# Altium PCB PCB_Indicator.PcbDoc
Units mm, origin at the board's own origin, x right, y up, seen from the top; angles counter-clockwise.
Board outline 30 x 30 mm, 2 copper layers (Top Layer, Bottom Layer); 17 components, 16 nets, 46 pads, 10 vias.
Unrouted connection lines stored in the file: 1.
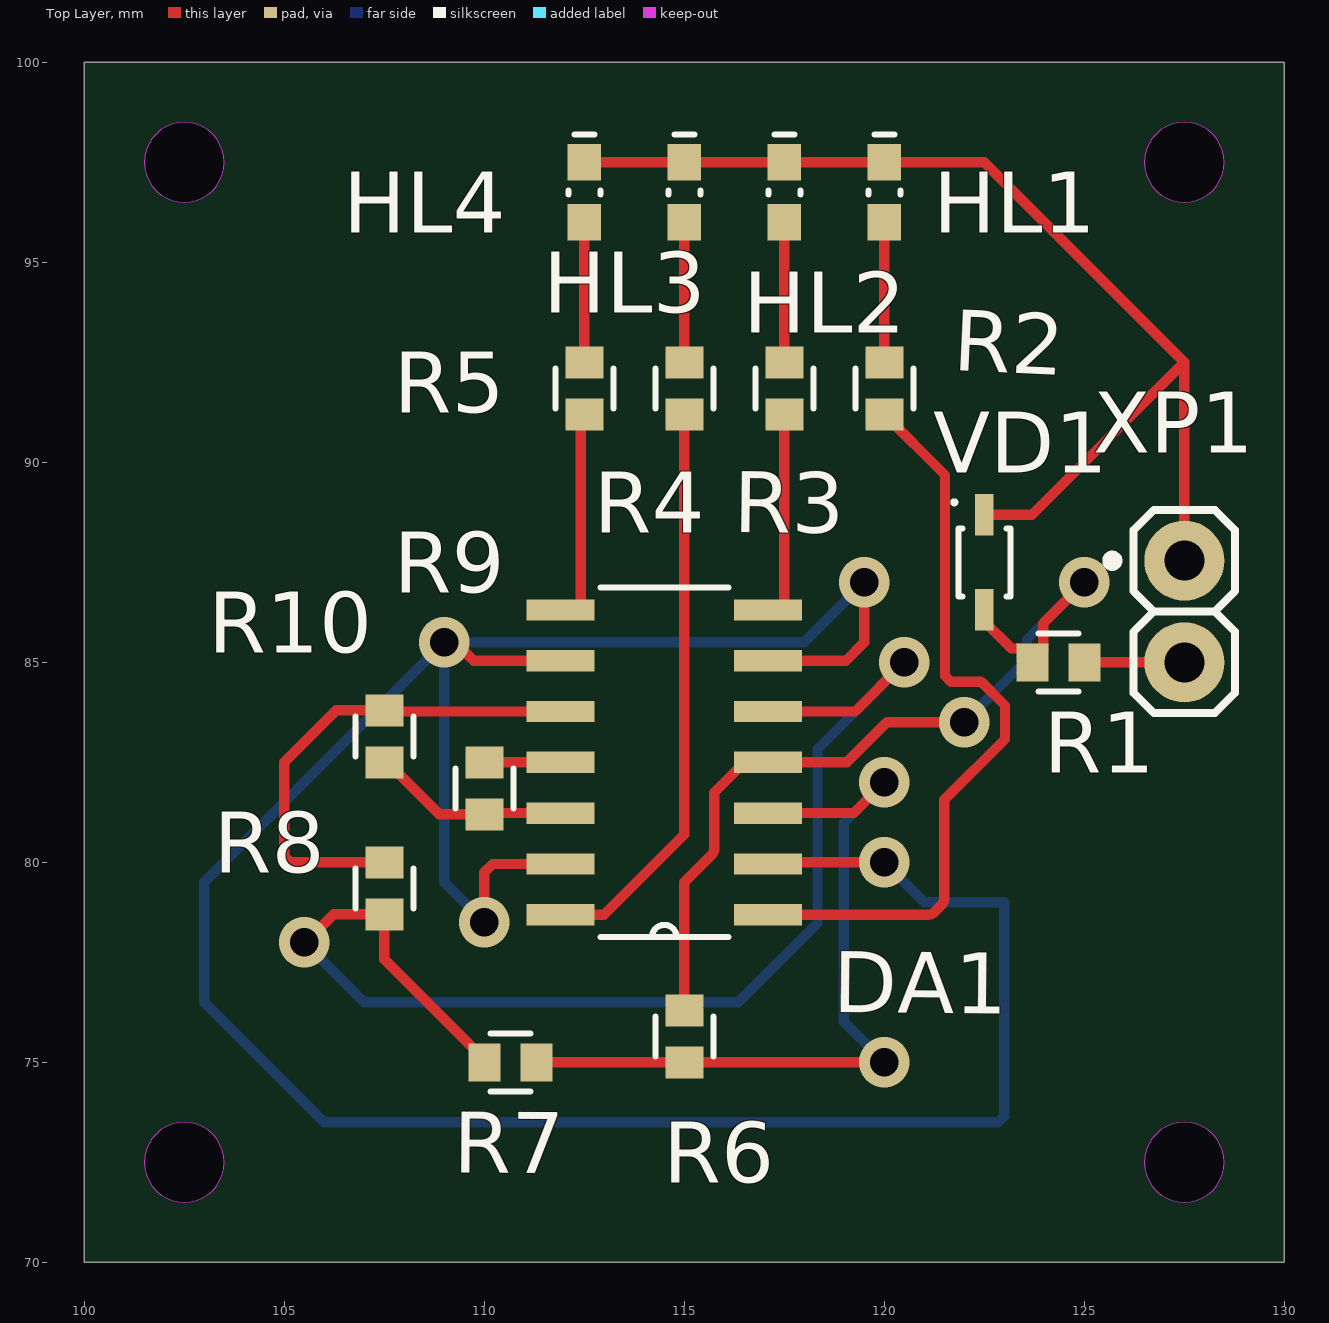
[diagram p0: Top Layer view]
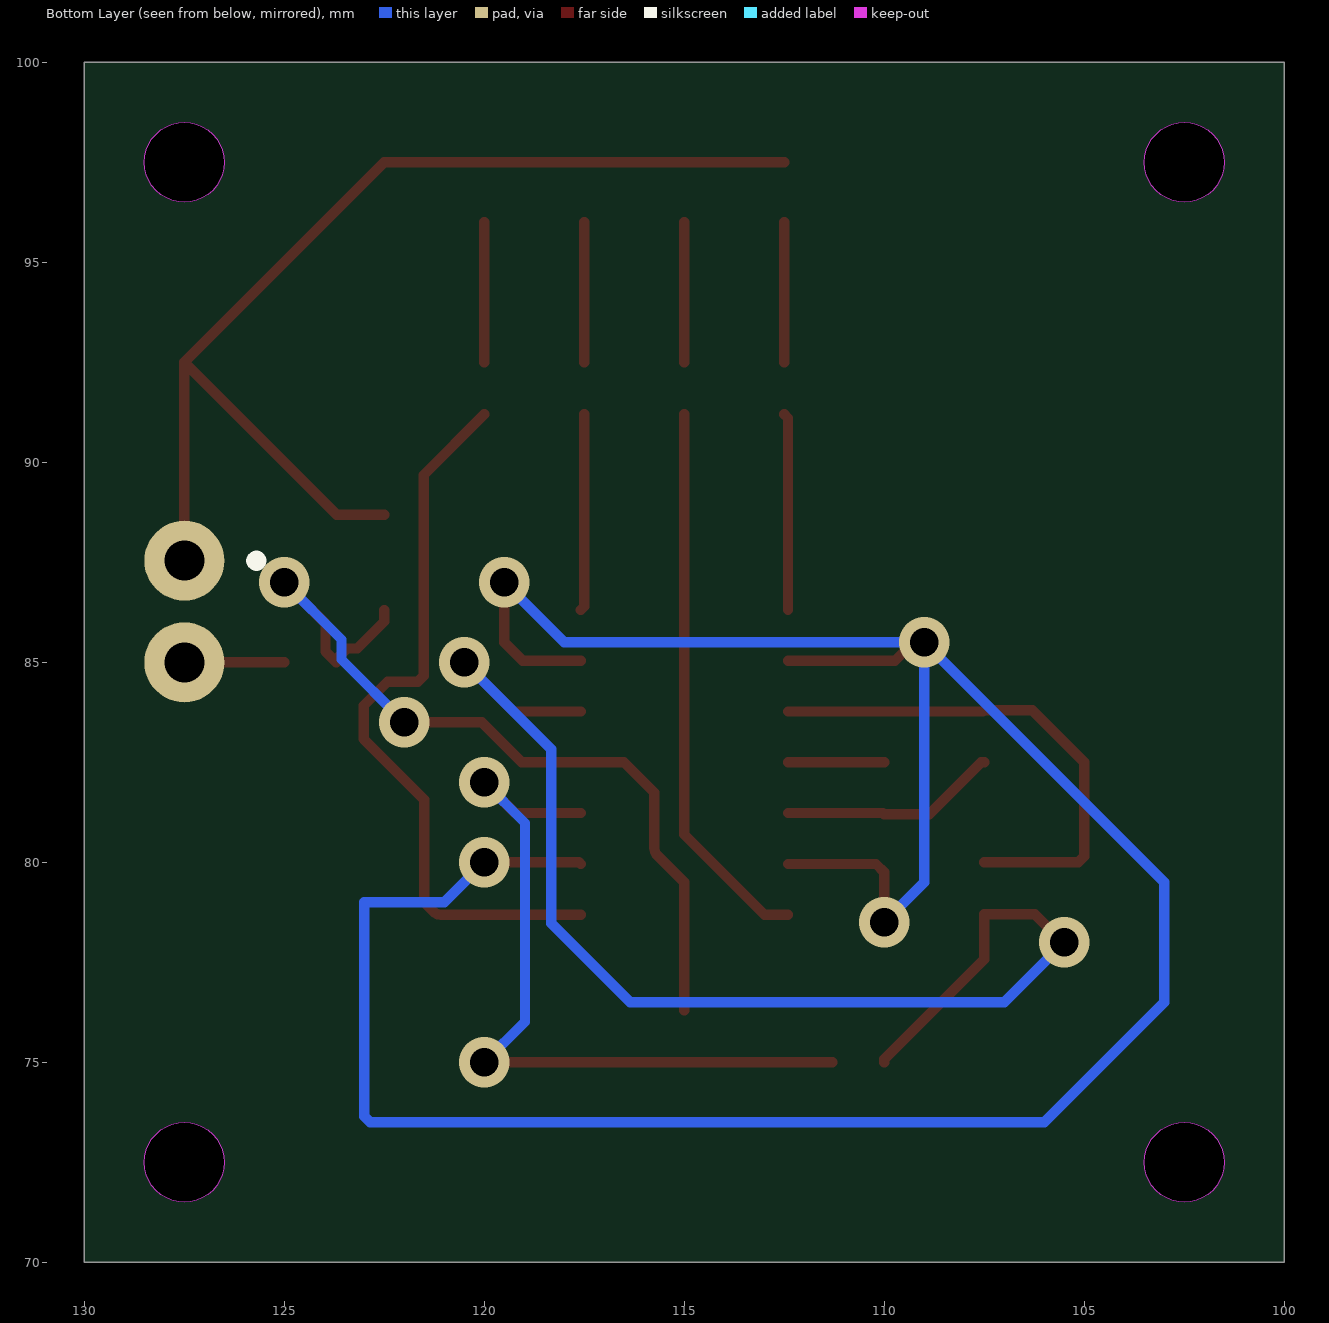
[diagram p1: Bottom Layer view, seen from below]

## Layer stack, top to bottom
Top Solder: solder mask 0.0102, Solder Resist, Dk 3.5
Top Layer: signal copper 0.0356
Dielectric 1: dielectric 0.32, FR-4, Dk 4.8
Bottom Layer: signal copper 0.0356
Bottom Solder: solder mask 0.0102, Solder Resist, Dk 3.5

## Board outline
100,70 100,100 130,100 130,70
cut-out: 126.5,97.5 ccw(c127.5,97.5) 127.5,96.5 ccw(c127.5,97.5) 128.5,97.5 ccw(c127.5,97.5) 127.5,98.5 ccw(c127.5,97.5)
cut-out: 101.5,97.5 ccw(c102.5,97.5) 102.5,96.5 ccw(c102.5,97.5) 103.5,97.5 ccw(c102.5,97.5) 102.5,98.5 ccw(c102.5,97.5)
cut-out: 101.5,72.5 ccw(c102.5,72.5) 102.5,71.5 ccw(c102.5,72.5) 103.5,72.5 ccw(c102.5,72.5) 102.5,73.5 ccw(c102.5,72.5)
cut-out: 126.5,72.5 ccw(c127.5,72.5) 127.5,71.5 ccw(c127.5,72.5) 128.5,72.5 ccw(c127.5,72.5) 127.5,73.5 ccw(c127.5,72.5)

## Design rules (kind name [scope] priority, off if disabled: settings)
Clearance [All] p1: gap=0.254 ignorepadtopadclearanceinfootprint=FALSE
PolygonConnect [All] p1: connectstyle=Relief reliefconductorwidth=0.254 reliefentries=4 polygonreliefangle="90 Angle" airgapwidth=0.254
RoutingVias [All] p1: holewidth=0.711 width=1.27 viastyle="Through Hole" minholewidth=0.711 minwidth=1.27 maxholewidth=0.711 maxwidth=1.27
SolderMaskExpansion [All] p1: expansion=0.102 istentingtop=FALSE
SupplyNets "Schematic Supply Nets" [InNet('GND')] p1: voltage=0.000
Width [All] p1: maxlimit=0.254 minlimit=0.254 preferedwidth=0.254
30 further rules are at their usual default settings.

## Components (designator, comment, footprint, x,y, rotation, side; value= is the part's Value field where it differs from the comment)
DA1 "LM324" SOIC-14 114.5,82.5 r180 top
HL1 "LED 0603 RED" 0603D_red 120,96.75 r270 top value=Красный
HL2 "LED 0603 YELLOW" 0603D_yellow 117.5,96.75 r270 top value=Жёлтый
HL3 "LED 0603 GREEN" 0603D_green 115,96.75 r270 top value=Зелёный
HL4 "LED 0603 YELLOW" 0603D_yellow 112.5,96.75 r270 top value=Жёлтый
R1 "Resistor" 0603R 124.35,85 r0 top value="1,0 к"
R2 "Resistor" 0603R 120,91.85 r270 top value="1,0 к"
R3 "Resistor" 0603R 117.5,91.85 r270 top value="1,0 к"
R4 "Resistor" 0603R 115,91.85 r90 top value="1,0 к"
R5 "Resistor" 0603R 112.5,91.85 r90 top value="1,0 к"
R6 "Resistor" 0603R 115,75.65 r270 top value="1,0 к"
R7 "Resistor" 0603R 110.65,75 r180 top value=68
R8 "Resistor" 0603R 107.5,79.35 r90 top value=43
R9 "Resistor" 0603R 107.5,83.15 r270 top value=56
R10 "Resistor" 0603R 110,81.85 r90 top value=510
VD1 "BZT52" SOD-323 122.5,87.5 r270 top
XP1 "PLS-2" PLS2 127.5,87.54 r0 top

## Footprints (in the part's own frame and the unit in brackets; to place one, negate y for a bottom-side part, rotate by r counter-clockwise, add the part's x,y. Pads: shape width x height; smd on the part's side, far side on the other; paste and mask are expansions set on the pad)
0603D_green [mm]
  rect 0.91x0.83 smd: 1(0.75,0) 2(-0.75,0)
  silkscreen extent -1.45,-0.4 0.05,0.4, body extent -0.8,-0.41 0.8,0.41, height 0.71
0603D_red [mm]
  rect 0.91x0.83 smd: 1(0.75,0) 2(-0.75,0)
  silkscreen extent -1.45,-0.4 0.05,0.4, body extent -0.8,-0.41 0.8,0.41, height 0.71
0603D_yellow [mm]
  rect 0.91x0.83 smd: 1(0.75,0) 2(-0.75,0)
  silkscreen extent -1.45,-0.4 0.05,0.4, body extent -0.8,-0.41 0.8,0.41, height 0.71
0603R [mm] "Chip Resistor, 2-Leads, Body 1.60x0.85mm, IPC Medium Density"
  rect 0.8x0.95 smd: 1(-0.65,0) 2(0.65,0)
  silkscreen extent -0.5,-0.72 0.5,0.72, body extent -0.8,-0.4 0.8,0.4, height 0.45
PLS2 [mm]
  round 2 hole 1: 1(0,0) 2(0,-2.54)
  silkscreen extent -1.92,-3.81 1.27,1.27, body extent -1.27,-3.81 1.27,1.27, height 8.44
SOD-323 [mm]
  rect 1.04x0.46 smd: 1(1.19,0) 2(-1.19,0)
  silkscreen extent -1.55,-0.8 0.85,0.65, body extent -1.25,-0.65 1.25,0.65, height 1.2
SOIC-14 [mil]
  rect 67x21 smd: 1(-102,150) 2(-102,100) 3(-102,50) 4(-102,0) 5(-102,-50) 6(-102,-100) 7(-102,-150) 8(102,-150) 9(102,-100) 10(102,-50) 11(102,0) 12(102,50) 13(102,100) 14(102,150)
  silkscreen extent -63,-172 63,172, body extent -118,-170 118,170, height 69

## Part data
HL1: "Светодиод 0603 Красный", Part Number="LED 0603 RED", Автор=rreali
HL2 HL4: "Светодиод 0603 Жёлтый", Part Number="LED 0603 YELLOW", Автор=rreali
HL3: "Светодиод 0603 Зелёный", Part Number="LED 0603 GREEN", Автор=rreali
R1 R2 R3 R4 R5 R6: library part Resistor_1.0k_1_0603, "Резистор номиналом 1,0 кОм 1%", Tolerance=1%, Part Number=Resistor_1.0k_1_0603
R7: library part Resistor_68_1_0603, "Резистор номиналом 68 Ом 1%", Tolerance=1%, Part Number=Resistor_68_1_0603
R8: library part Resistor_43_1_0603, "Резистор номиналом 43 Ом 1%", Tolerance=1%, Part Number=Resistor_43_1_0603
R9: library part Resistor_56_1_0603, "Резистор номиналом 56 Ом 1%", Tolerance=1%, Part Number=Resistor_56_1_0603
R10: library part Resistor_510_1_0603, "Резистор номиналом 510 Ом 1%", Tolerance=1%, Part Number=Resistor_510_1_0603
XP1: "Гребенка 2 пина", Value1={Value1}, Value2={Value2}, Part Number=PLS-2, System=Connector, Автор=rreali
VD1: напряжение=5

## Via types
v1: diameter 1.27, hole 0.711, Top Layer to Bottom Layer, 10 vias

## Nets (pads, with @x,y where several pads share a name; then routed paths per layer and width w, separated by ;. In a path a pad name is that pad's centre, name@x,y a point inside that pad or via, vN(x,y) a via of type N, cw(c..) or ccw(c..) an arc to the next point about the centre after c; other vN are vias at no path point)
GND: DA1.11 HL1.2 HL2.2 HL3.2 HL4.2 R10.2 VD1.2 XP1.1 | length 31
  Top Layer w0.254: R10.2 DA1.11@112.409,82.5 ; HL4.2 HL3.2 HL2.2 HL1.2 122.5,97.5 127.5,92.5 ; VD1.2 123.69,88.69 127.5,92.5 ; XP1.1 127.5,92.5
NetDA1_1: DA1.1 R2.2 | length 18.5
  Top Layer w0.254: DA1.1@117.591,78.69 121.085,78.69 ccw(c121.085,78.944) 121.237,78.741 ccw(c121.085,78.944) 121.264,78.764 121.426,78.926 ccw(c121.246,79.105) 121.449,78.953 ccw(c121.246,79.105) 121.5,79.105 121.5,81.563 123.016,83.079 123.016,83.921 122.421,84.516 121.665,84.516 121.516,84.665 121.516,89.684 R2.2
NetDA1_2: DA1.2 DA1.6 DA1.9 DA1.13 | length 73.5
  Top Layer w0.254: v1(109,85.5) 109.275,85.5 109.735,85.04 DA1.9@112.409,85.04 ; v1(110,78.5) 110,79.75 110.21,79.96 DA1.13 DA1.13@112.409,79.96 ; DA1.2@117.591,79.96 117.631,80 v1(120,80) ; DA1.6@117.591,85.04 119.04,85.04 119.5,85.5 v1(119.5,87)
  Bottom Layer w0.254: v1(110,78.5) 109,79.5 v1(109,85.5) ; v1(119.5,87) 118,85.5 v1(109,85.5) ; v1(120,80) 121,79 123,79 123,73.649 122.851,73.5 106,73.5 103,76.5 103,79.5 v1(109,85.5)
NetDA1_3: DA1.3 R6.2 R7.1 | length 19.3
  Top Layer w0.254: R7.1 R6.2 v1(120,75) ; DA1.3@117.591,81.23 119.23,81.23 v1(120,82)
  Bottom Layer w0.254: v1(120,75) 118.984,76.016 118.984,80.984 v1(120,82)
NetDA1_4: DA1.4 R1.1 R6.1 VD1.1 | length 22
  Top Layer w0.254: R6.1 115,79.5 115.676,80.176 ccw(c115.496,80.355) 115.699,80.203 ccw(c115.496,80.355) 115.75,80.355 115.75,81.743 116.507,82.5 DA1.4 119.063,82.5 120.063,83.5 v1(122,83.5) ; VD1.1 122.5,86.02 123.172,85.348 123.427,85.348 123.7,85.075 R1.1 123.973,85.273 123.973,85.973 v1(125,87)
  Bottom Layer w0.254: v1(122,83.5) 123.569,85.069 123.569,85.569 v1(125,87)
NetDA1_5: DA1.5 R7.2 R8.1 | length 32.1
  Top Layer w0.254: v1(105.5,78) 105.537,78 106.237,78.7 R8.1 107.5,77.575 110,75.075 R7.2 ; DA1.5@117.591,83.77 119.27,83.77 v1(120.5,85)
  Bottom Layer w0.254: v1(105.5,78) 107,76.5 116.351,76.5 118.328,78.477 118.328,82.828 v1(120.5,85)
NetDA1_7: DA1.7 R3.2 | length 4.9
  Top Layer w0.254: R3.2 117.5,86.401 DA1.7@117.591,86.31
NetDA1_8: DA1.8 R5.1 | length 4.9
  Top Layer w0.254: DA1.8@112.409,86.31 112.409,91.109 R5.1
NetDA1_10: DA1.10 R8.2 R9.1 | length 12.9
  Top Layer w0.254: R8.2 105.149,80 105,80.149 105,82.5 106.3,83.8 R9.1 107.53,83.77 DA1.10@112.409,83.77
NetDA1_12: DA1.12 R9.2 R10.1 | length 5.5
  Top Layer w0.254: R9.2 107.575,82.5 108.875,81.2 R10.1 110.03,81.23 DA1.12@112.409,81.23
NetDA1_14: DA1.14 R4.1 | length 13.9
  Top Layer w0.254: DA1.14@112.409,78.69 112.993,78.69 115,80.697 R4.1
NetHL1_1: HL1.1 R2.1 | length 3.5
  Top Layer w0.254: R2.1 HL1.1
NetHL2_1: HL2.1 R3.1 | length 3.5
  Top Layer w0.254: R3.1 HL2.1
NetHL3_1: HL3.1 R4.2 | length 3.5
  Top Layer w0.254: R4.2 HL3.1
NetHL4_1: HL4.1 R5.2 | length 3.5
  Top Layer w0.254: R5.2 HL4.1
NetR1_2: R1.2 XP1.2 | length 2.5
  Top Layer w0.254: R1.2 XP1.2

## Silkscreen, mask and mechanical layers (free items; w line width, h text height)
Mechanical 1:
  circle w0.254: c127.5,97.5 r1
  circle w0.254: c102.5,97.5 r1
  circle w0.254: c102.5,72.5 r1
  circle w0.254: c127.5,72.5 r1
  pour cut-out: 126.5,97.5 ccw(c127.5,97.5) 127.5,96.5 ccw(c127.5,97.5) 128.5,97.5 ccw(c127.5,97.5) 127.5,98.5 ccw(c127.5,97.5)
  pour cut-out: 101.5,97.5 ccw(c102.5,97.5) 102.5,96.5 ccw(c102.5,97.5) 103.5,97.5 ccw(c102.5,97.5) 102.5,98.5 ccw(c102.5,97.5)
  pour cut-out: 101.5,72.5 ccw(c102.5,72.5) 102.5,71.5 ccw(c102.5,72.5) 103.5,72.5 ccw(c102.5,72.5) 102.5,73.5 ccw(c102.5,72.5)
  pour cut-out: 126.5,72.5 ccw(c127.5,72.5) 127.5,71.5 ccw(c127.5,72.5) 128.5,72.5 ccw(c127.5,72.5) 127.5,73.5 ccw(c127.5,72.5)
  lines w0.254: 100,70 130,70 130,100 100,100 100,70
  lines w1: 100,70 130,70 130,100 100,100 100,70 ; 101.5,72.5 cw(c102.5,72.5) 102.5,73.5 cw(c102.5,72.5) 103.5,72.5 cw(c102.5,72.5) 102.5,71.5 cw(c102.5,72.5) 101.5,72.5 ; 101.5,97.5 cw(c102.5,97.5) 102.5,98.5 cw(c102.5,97.5) 103.5,97.5 cw(c102.5,97.5) 102.5,96.5 cw(c102.5,97.5) 101.5,97.5 ; 126.5,72.5 cw(c127.5,72.5) 127.5,73.5 cw(c127.5,72.5) 128.5,72.5 cw(c127.5,72.5) 127.5,71.5 cw(c127.5,72.5) 126.5,72.5 ; 126.5,97.5 cw(c127.5,97.5) 127.5,98.5 cw(c127.5,97.5) 128.5,97.5 cw(c127.5,97.5) 127.5,96.5 cw(c127.5,97.5) 126.5,97.5